# Altium PCB PCB1.PcbDoc
Units mm, origin at the board's own origin, x right, y up, seen from the top; angles counter-clockwise.
Board outline 100 x 60 mm, 2 copper layers (Top Layer, Bottom Layer); 35 components, 23 nets, 81 pads, 0 vias.
Unrouted connection lines stored in the file: 53.
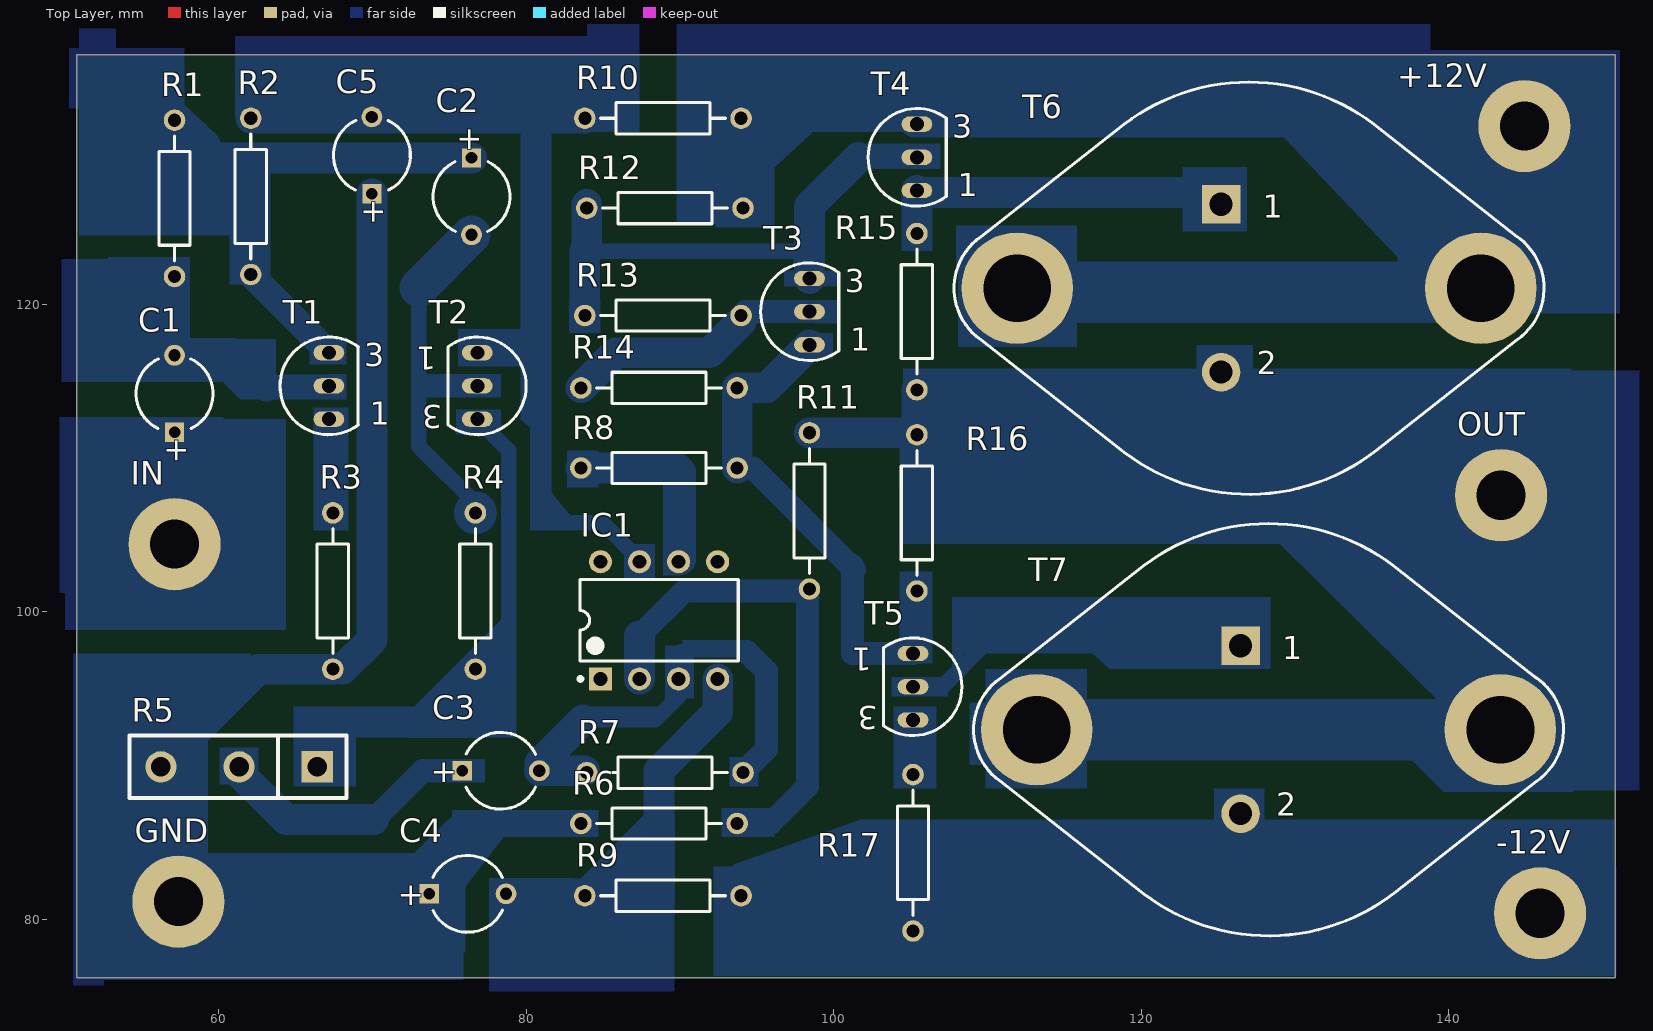
[diagram p0: Top Layer view]
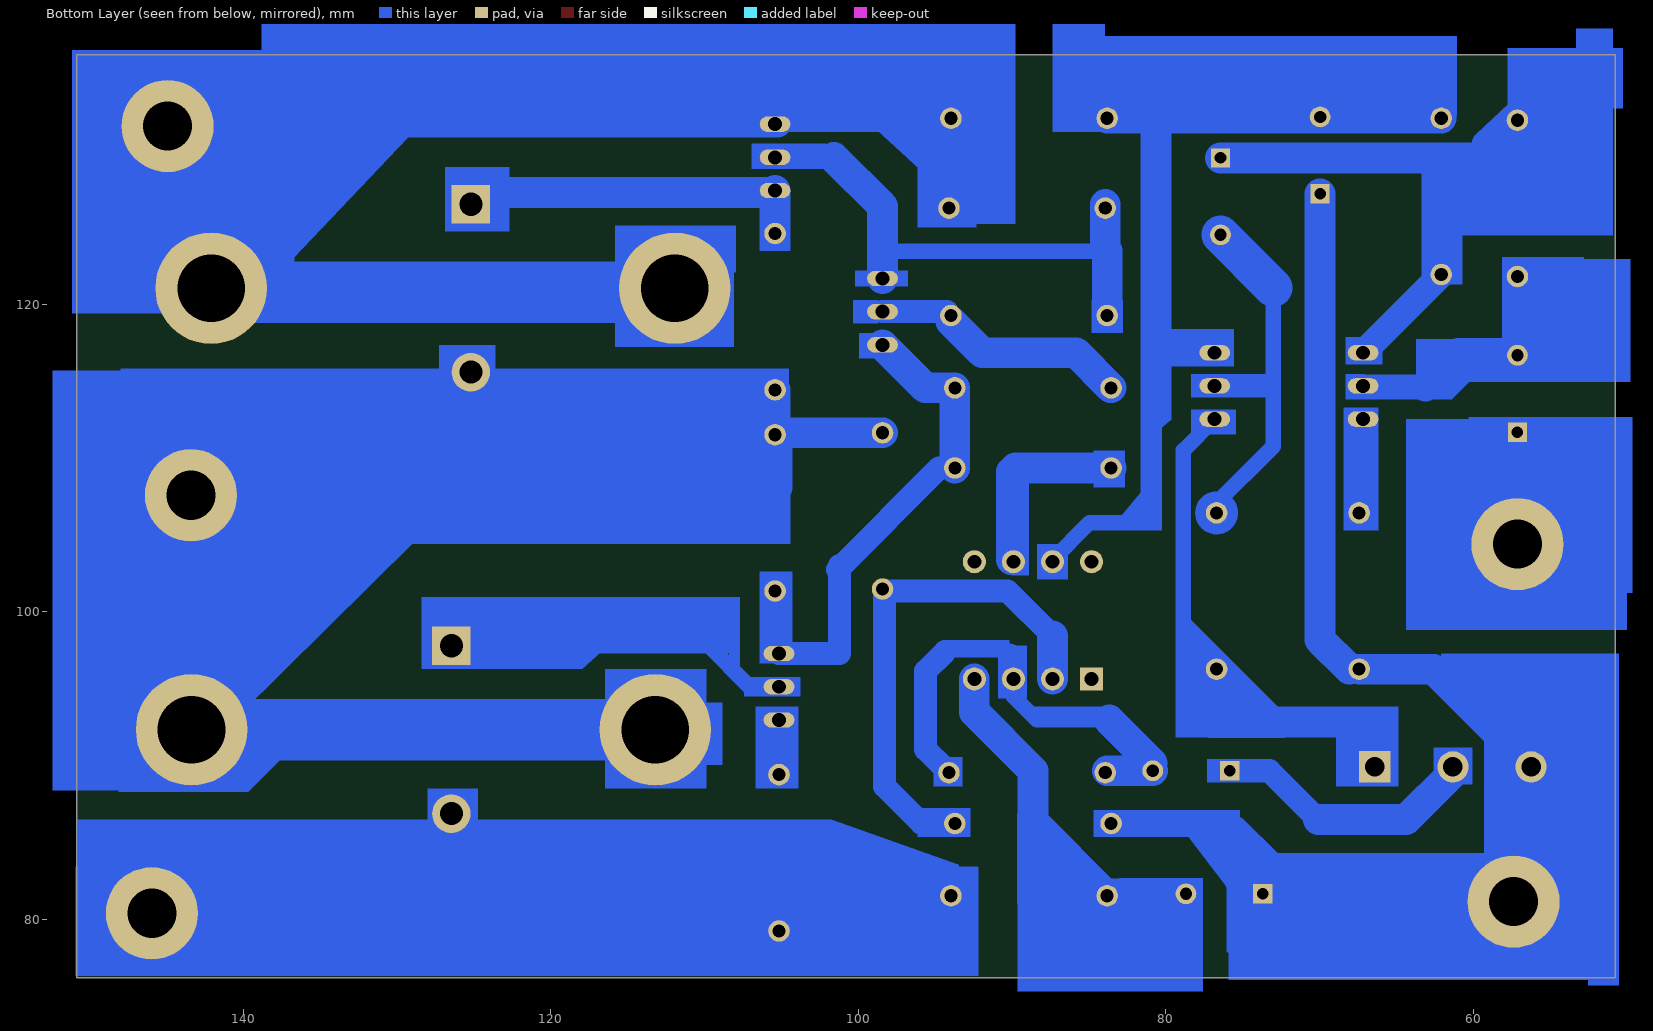
[diagram p1: Bottom Layer view, seen from below]

## Layer stack, top to bottom
Top Solder: solder mask 0.0102, Solder Resist, Dk 3.5
Top Layer: signal copper 0.0356
Dielectric 1: dielectric 0.32, FR-4, Dk 4.8
Bottom Layer: signal copper 0.0356
Bottom Solder: solder mask 0.0102, Solder Resist, Dk 3.5

## Board outline
50.8,76.2 150.8,76.2 150.8,136.2 50.8,136.2

## Design rules (kind name [scope] priority, off if disabled: settings)
Clearance [All] p1: gap=0.3
PolygonConnect [All] p1: connectstyle=Relief reliefconductorwidth=0.254 reliefentries=4 polygonreliefangle="90 Angle" airgapwidth=0.254
RoutingVias [All] p1: holewidth=0.8 width=1.6 viastyle="Through Hole" minholewidth=0.711 minwidth=1.27 maxholewidth=0.711 maxwidth=1.27
SolderMaskExpansion [All] p1: expansion=0.102
Width [All] p1: maxlimit=0.5 minlimit=0.254 preferedwidth=0.254
30 further rules are at their usual default settings.

## Components (designator, comment, footprint, x,y, rotation, side; value= is the part's Value field where it differs from the comment)
+12V "TP" TP2 144.907,131.572 r0 top
-12V "TP" TP2 145.923,80.391 r0 top
C1 "" CAPPR5-5x5 57.15,114.173 r90 top
C2 "" CAPPR5-5x5 76.454,127 r270 top
C3 "" CAPPR5-5x5 78.359,89.662 r0 top
C4 "" CAPPR5-5x5 76.2,81.661 r0 top
C5 "" CAPPR5-5x5 69.977,129.667 r90 top
GND "TP" TP2 57.404,81.153 r0 top
IC1 "uA741" DIP-8 88.646,99.441 r90 top
IN "TP" TP2 57.15,104.394 r0 top
OUT "TP" TP2 143.383,107.569 r0 top
R1 "" AXIAL-0.4 57.15,126.873 r90 top
R2 "" AXIAL-0.4 62.103,127 r90 top
R3 "" AXIAL-0.4 67.437,101.346 r90 top
R4 "" AXIAL-0.4 76.708,101.346 r90 top
R5 "RPOT" RPOT 66.421,89.916 r180 top
R6 "" AXIAL-0.4 88.646,86.233 r180 top
R7 "" AXIAL-0.4 89.027,89.535 r180 top
R8 "" AXIAL-0.4 88.646,109.347 r180 top
R9 "" AXIAL-0.4 88.9,81.534 r180 top
R10 "" AXIAL-0.4 88.9,132.08 r180 top
R11 "" AXIAL-0.4 98.425,106.553 r90 top
R12 "" AXIAL-0.4 89.027,126.238 r180 top
R13 "" AXIAL-0.4 88.9,119.253 r180 top
R14 "" AXIAL-0.4 88.646,114.554 r180 top
R15 "" AXIAL-0.4 105.41,119.507 r90 top
R16 "" AXIAL-0.4 105.41,106.426 r90 top
R17 "" AXIAL-0.4 105.156,84.328 r90 top
T1 "9014" TANS 67.183,114.681 r0 top
T2 "9012" TANS 76.835,114.681 r180 top
T3 "9014" TANS 98.425,119.507 r0 top
T4 "8050" TANS 105.41,129.54 r0 top
T5 "8550" TANS 105.156,95.123 r180 top
T6 "2N3055" TO-3 127,121.031 r0 top
T7 "2N3055" TO-3 128.27,92.329 r0 top

## Footprints (in the part's own frame and the unit in brackets; to place one, negate y for a bottom-side part, rotate by r counter-clockwise, add the part's x,y. Pads: shape width x height; smd on the part's side, far side on the other; paste and mask are expansions set on the pad)
AXIAL-0.4 [mm] "Axial Device, Thru-Hole; 2 Leads; 0.4 in Pin Spacing"
  round 1.4 hole 0.85: 1(-5.08,0) 2(5.08,0)
  silkscreen extent -4.06,-1.02 4.06,1.02
CAPPR5-5x5 [mm] "Capacitor, Electrolytic, Radial; Body 5 x 5 mm (Dia.xH typ); Pin Spacing 5 mm (typ)"
  rect 1.25x1.25 hole 0.75: 1(-2.5,0)
  round 1.35 hole 0.8: 2(2.5,0)
  silkscreen extent -2.26,-2.5 2.27,2.5
DIP-8 [mm] "DIP; 8 Leads; Row Spacing 7.62 mm; Pitch 2.54 mm"
  rect 1.5x1.5 hole 0.9: 1(-3.81,3.81)
  round 1.5 hole 0.9: 2(-3.81,1.27) 3(-3.81,-1.27) 4(-3.81,-3.81) 5(3.81,-3.81) 6(3.81,-1.27) 7(3.81,1.27) 8(3.81,3.81)
  silkscreen extent -3.93,-5.15 2.65,5.23, body extent -3.6,-5.15 3.6,5.15, height 5.08
RPOT [mil]
  rect 80x80 hole 50: 1(0,0)
  round 80 hole 50: 2(200,0) 3(400,0)
  silkscreen extent -75,-80 480,80
TANS [mm] "TO, Flat Index; 3 In-Line, Axial Leads; Body Dia. 4.5mm; Leads 0.51 x 0.48 mm (max)"
  oval 2x1 hole 0.9: 1(0,-2.159) 2(0,0) 3(0,2.159)
  silkscreen extent -3.17,-3.17 1.92,3.17
TO-3 [mm]
  rect 2.5x2.5 hole 1.5: 1(-1.815,5.46)
  round 2.5 hole 1.5: 2(-1.815,-5.46)
  round 7.25 hole 4.4: 3(-15.075,0) 3(15.075,0)
  silkscreen extent -19.17,-13.4 19.17,13.4
TP2 [mm]
  round 6 hole 3.2: 1(0,0)

## Part data
C1 C2 C3 C4 C5: library part Cap, "Capacitor"
IC1: "OAP"
R1 R2 R3 R4 R6 R7 R8 R9 R10 R11 R12 R13 R14 R15 R16 R17: library part Res2, "Resistor"
R5: "Potentiometer"
T1 T3 T4 T6 T7: library part 2N3904, "NPN General Purpose Amplifier"
T2 T5: library part 2N3906, "PNP General Purpose Amplifier"

## Nets (pads, with @x,y where several pads share a name; then routed paths per layer and width w, separated by ;. In a path a pad name is that pad's centre, name@x,y a point inside that pad or via, vN(x,y) a via of type N, cw(c..) or ccw(c..) an arc to the next point about the centre after c; other vN are vias at no path point)
1: IC1.1
8: IC1.8
+12: +12V.1 R10.2 R12.2 T4.3 T6.3 | length 28.2
  Bottom Layer w1: 83.82,123.444 98.425,123.444
  Bottom Layer w2: 61,116.8 63.119,114.681 ; 85.852,116.84 91.948,116.84 ; 98.425,126.365 101.6,129.54
-12: -12V.1 R9.2 R17.1 T7.1
GND: C4.2 C5.1 GND.1 R3.1 R5.3 R6.1 R7.1
NetC1_1: C1.1 IN.1 | length 3.6
  Bottom Layer w2: 57.404,116.8 61,116.8
NetC1_2: C1.2 R1.1 T1.2 | length 6.9
  Bottom Layer w0.254: 59.15,130.334 59.69,129.794
  Bottom Layer w2: 57.15,115.951 R1.1@57.15,122.047
NetC2_1: C2.1 R1.2 R2.1 T1.3
NetC2_2: C2.2 R4.1 T2.2
NetC3_1: C3.1 R5.2
NetC3_2: C3.2 IC1.3 R7.2
NetC4_1: C4.1 IC1.4 R9.1
NetC5_2: C5.2 IC1.7 R2.2 R10.1 T2.1
NetIC1_2: IC1.2 R6.2 R11.1
NetIC1_6: IC1.6 R8.1
NetOUT_1: OUT.1 R11.2 R15.1 R16.2 T6.1 T7.3
NetR3_2: R3.2 T1.1
NetR5_1: R5.1 T2.3
NetR8_2: R8.2 R14.1 T3.1 T5.2
NetR12_1: R12.1 R13.2 T3.3 T4.2
NetR13_1: R13.1 R14.2 T3.2
NetR15_2: R15.2 T4.1 T6.2 | length 28.8
  Bottom Layer w4: 114.046,92.329 142.875,92.329
NetR17_2: R17.2 T5.3 T7.2
pads on no net: IC1.5 R4.2 R16.1 T5.1
copper on no net: | length 599.5
  Bottom Layer w0.254: 56.515,80.899 57.277,81.661 ; 57.023,132.334 57.531,131.953 57.404,131.953 ; 57.15,104.394 57.404,104.648 ; 57.404,121.793 57.658,121.793 ; 61.341,89.535 61.341,89.916 ; 66.929,117.094 67.056,117.094 ; 67.183,106.68 67.437,106.426 ; 67.437,96.266 68.072,96.266 ; 73.025,114.808 73.152,114.681 ; 73.152,92.837 73.025,92.964 73.279,92.964 ; 73.533,83.693 73.533,81.828 73.7,81.661 ; 75.311,85.471 76.073,86.233 ; 76.073,95.758 76.2,95.758 ; 76.835,95.758 76.835,96.012 ; 76.835,112.522 77.597,112.522 ; 78.74,96.266 78.867,96.393 ; 80.732,89.789 81.367,90.424 ; 83.566,109.347 83.82,109.347 ; 83.566,119.253 83.82,119.507 ; 83.693,81.661 83.82,81.534 ; 83.693,109.093 84.074,109.093 ; 83.82,89.662 83.947,89.789 ; 83.82,123.444 83.947,123.571 ; 87.376,95.631 87.376,96.012 ; 87.376,103.251 87.376,103.378 ; 89.281,97.028 cw(c90.233,96.837) 90.424,97.79 ; 89.789,109.347 90.043,109.093 ; 93.98,118.872 93.98,119.253 94.234,119.507 ; 93.98,132.08 94.361,131.699 ; 104.775,111.633 104.902,111.76 ; 104.902,124.587 105.41,125.095 ; 105.156,97.282 105.41,97.536 ; 105.283,108.077 105.41,108.204 ; 105.283,111.633 105.41,111.76 ; 112.903,121.158 113.284,120.777 ; 124.422,127.254 125.185,126.491 ; 125.095,108.458 125.095,115.316 ; 126.455,81.878 126.656,81.878 ; 143.345,105.245 145.415,107.315 ; 145.923,131.826 146.05,131.953 ; 146.939,81.407 147.574,81.407 147.955,81.026
  Bottom Layer w0.5: 77.858,106.426 ccw(c76.708,106.426) 77.858,106.426
  Bottom Layer w0.8: 90.551,97.409 94.361,97.409
  Bottom Layer w1: 73.025,121.071 73.025,110.744 76.835,106.934 ; 73.152,114.681 76.835,114.681 ; 76.708,96.266 78.74,96.266 ; 76.835,112.522 78.867,110.49 78.867,98.044 78.867,96.393 ; 76.835,116.84 76.835,117.602 ; 83.693,92.964 88.392,92.964 89.916,94.488 89.916,95.631 ; 83.693,105.791 84.963,105.791 87.376,103.378 ; 89.916,96.774 90.551,97.409 ; 93.726,109.347 94.742,109.347 ; 94.361,131.699 105.41,131.699 ; 101.6,129.54 105.41,129.54 ; 105.156,95.123 107.061,95.123 109.728,97.79 111.76,97.79 ; 111.632,97.789 126.455,97.789
  Bottom Layer w1.5: 63.119,114.681 67.183,114.681 ; 70.104,86.487 73.279,89.662 75.732,89.662 ; 76.073,86.233 83.566,86.233 ; 76.835,105.918 76.835,106.934 ; 87.376,98.425 90.297,101.346 98.298,101.346 98.298,88.646 95.885,86.233 93.726,86.233 ; 89.916,95.631 89.916,96.774 ; 94.234,119.507 98.425,119.507 ; 94.361,89.789 95.631,91.059 95.631,92.964 95.631,96.139 94.361,97.409 ; 94.742,109.347 101.346,102.743 ; 101.219,97.282 105.156,97.282 ; 101.219,102.997 101.219,97.536 101.346,97.409 ; 105.156,89.408 105.156,92.964 ; 105.41,97.536 105.41,101.346
  Bottom Layer w1.7: 62.103,121.92 66.929,117.094
  Bottom Layer w2: 56.515,90.17 62.611,96.266 67.437,96.266 ; 57.023,132.334 59.15,130.334 ; 59.777,129.5 76.454,129.5 ; 61.341,89.535 64.389,86.487 70.104,86.487 ; 62.103,132.08 68.62,132.08 83.82,132.08 ; 66.421,89.916 66.421,92.837 73.152,92.837 ; 67.183,106.68 67.183,112.141 ; 68.072,96.266 69.977,98.171 69.977,127.167 ; 73.279,92.964 76.073,95.758 ; 73.533,83.693 75.565,85.725 ; 78.7,81.661 83.693,81.661 ; 80.645,121.412 80.645,132.08 ; 80.859,89.662 83.82,89.662 ; 80.899,90.17 83.693,92.964 ; 83.566,109.347 89.789,109.347 ; 83.566,114.554 85.852,116.84 ; 83.82,81.534 88.646,86.36 88.646,89.662 92.456,93.472 92.456,95.631 ; 83.82,119.507 83.82,123.444 ; 83.947,123.571 83.947,126.492 ; 87.376,95.631 87.376,98.425 ; 90.043,103.378 90.043,109.093 ; 91.948,116.84 93.98,118.872 ; 93.726,109.347 93.726,114.554 95.631,114.554 98.425,117.348 ; 98.425,111.633 105.283,111.633 105.283,108.077 ; 98.425,121.666 98.425,126.365 ; 105.283,131.826 145.923,131.826 ; 105.41,108.204 131.191,108.204 ; 105.41,111.76 105.41,114.427 ; 105.41,125.095 105.41,127.381 ; 105.41,127.254 124.422,127.254
  Bottom Layer w2.5: 73.025,121.071 76.454,124.5
  Bottom Layer w3: 130.937,108.331 143.637,108.331 ; 142.075,121.031 146.05,125.006 146.05,131.318
  Bottom Layer w4: 113.284,120.777 142.113,120.777
  Bottom Layer w5: 56.515,80.899 56.515,90.17

## Other copper
Bottom Layer:
  rectangle net NetIC1_6: 88.9,102.362 90.043,108.839
  rectangle net NetR8_2: 98.933,116.459 99.949,118.11
  rectangle net NetR13_1: 98.679,118.745 100.33,120.269
  rectangle net NetR12_1: 96.774,121.158 100.203,122.174
  rectangle net NetR12_1: 102.108,128.778 106.934,130.429
  rectangle net NetR15_2: 104.394,123.444 106.426,125.73
  rectangle net +12: 107.95,122.047 115.824,125.095
  rectangle net +12: 108.077,117.221 115.824,124.714
  rectangle net NetR15_2: 123.571,114.427 127.254,117.348
  rectangle net NetOUT_1: 108.839,90.043 111.379,94.107
  rectangle: 109.855,88.519 116.459,96.266
  rectangle net NetR17_2: 124.714,84.963 128.016,88.519
  rectangle: 104.267,97.536 105.156,102.616
  rectangle: 104.775,96.647 106.426,102.616
  rectangle net NetR8_2: 103.759,94.488 107.442,95.758
  rectangle net NetR17_2: 103.886,88.519 106.68,93.853
  rectangle net NetC4_1: 92.202,76.327 95.885,83.439
  rectangle net GND: 92.71,86.741 96.012,87.249
  rectangle net GND: 92.71,85.344 96.139,86.995
  rectangle net GND: 93.218,88.646 95.123,90.551
  rectangle net NetC3_2: 89.027,94.361 90.932,97.79
  rectangle net NetC5_2: 86.36,102.108 88.392,104.394
  rectangle net NetR8_2: 82.677,108.077 84.709,110.49
  rectangle net NetR8_2: 82.804,108.331 84.709,110.236
  rectangle net NetR12_1: 82.804,118.11 84.836,120.269
  rectangle net NetC2_2: 73.406,113.919 78.359,115.443
  rectangle net NetR5_1: 75.438,111.506 78.359,113.157
  rectangle: 77.216,85.344 79.883,85.725
  rectangle net NetIC1_2: 75.184,86.487 79.883,87.122
  rectangle net NetIC1_2: 79.883,85.344 84.709,87.122
  rectangle net NetIC1_2: 80.264,86.36 84.201,87.122
  rectangle net NetC3_1: 75.184,88.9 77.343,90.424
  rectangle net NetR5_1: 64.897,88.646 68.961,93.853
  rectangle net NetC3_1: 60.071,88.773 61.214,91.186
  rectangle net NetC3_1: 60.325,88.773 62.611,91.186
  rectangle net NetC2_1: 65.913,116.078 68.326,117.856
  rectangle net NetC1_2: 67.056,114.554 68.326,115.443
  rectangle net NetR3_2: 66.167,107.569 68.453,113.284
  rectangle net NetR3_2: 66.167,105.283 68.453,107.569
  rectangle: 77.47,106.172 77.724,106.68
  rectangle: 75.692,106.299 76.073,106.807
  rectangle: 77.089,105.918 77.597,107.061
  rectangle: 75.819,105.664 77.47,107.315
  rectangle: 90.17,97.409 94.488,98.171
  rectangle: 89.662,97.536 90.17,97.79
  rectangle: 89.662,97.282 90.297,97.536
  rectangle: 89.789,125.222 94.107,138.43
  rectangle net +12: 83.947,131.191 87.376,139.192
  rectangle: 83.439,93.218 88.773,93.853
  rectangle net NetC1_1: 50.038,98.806 64.389,102.108
  rectangle net NetC1_1: 60.071,101.092 64.389,112.522
  rectangle net -12: 77.597,75.311 89.662,81.026
  rectangle net GND: 52.324,76.073 75.946,78.486
  rectangle net GND: 50.546,75.692 52.578,97.282
  rectangle net NetC1_1: 49.657,101.219 53.594,112.649
  rectangle net NetC1_1: 49.784,114.935 53.213,122.936
  rectangle net NetC2_1: 50.927,124.46 53.34,137.922
  rectangle net NetC2_1: 50.292,132.715 57.785,136.652
  rectangle: 61.087,132.207 84.709,137.414
  rectangle net NetOUT_1: 122.682,126.111 126.873,128.905
  rectangle net NetOUT_1: 122.682,124.714 126.873,126.111
  rectangle net NetOUT_1: 126.492,126.111 126.873,126.746
  rectangle: 126.492,128.016 126.619,128.143
  rectangle: 92.329,132.842 138.811,138.557
  rectangle net +12: 138.176,119.38 151.13,136.525
  rectangle: 101.727,82.931 150.749,86.487
  rectangle net NetOUT_1: 142.875,88.392 152.4,115.697
  rectangle: 93.472,76.327 150.876,83.439
  rectangle: 56.515,129.032 59.055,131.064
  rectangle net NetC2_1: 52.705,124.46 61.595,129.413
  rectangle net NetC2_1: 52.832,124.714 57.404,133.223
  rectangle net NetC2_1: 60.706,121.285 63.373,130.429
  rectangle: 104.521,110.363 147.955,115.824
  rectangle net +12: 136.652,119.38 148.082,134.874
  rectangle net NetOUT_1: 104.394,104.394 146.558,110.617
  rectangle net NetOUT_1: 139.7,88.773 146.431,110.617
  rectangle net NetOUT_1: 145.415,88.9 148.082,110.617
  rectangle: 93.472,77.597 148.082,83.439
  rectangle net -12: 109.474,97.79 127.508,100.965
  rectangle net -12: 117.983,96.266 128.397,100.965
  rectangle net -12: 107.696,97.282 109.474,100.965
  rectangle net -12: 107.696,96.456 108.394,97.282
  rectangle net NetC1_1: 52.832,114.935 58.166,123.063
  rectangle net NetC1_1: 52.832,101.092 60.325,112.649
  rectangle net NetC1_1: 57.658,114.935 61.468,116.078
  rectangle: 61.468,113.792 68.326,115.189
  rectangle net NetC1_1: 61.214,115.316 63.754,117.729
  rectangle net NetOUT_1: 139.7,88.265 148.082,89.154
  rectangle: 77.089,91.821 79.375,96.901
  rectangle: 79.629,112.522 81.661,123.19
  rectangle: 75.565,115.951 81.026,118.364
  rectangle: 75.819,116.078 80.264,117.983
  rectangle: 80.264,105.283 81.661,112.903
  rectangle: 80.264,105.283 85.09,106.299
  rectangle net NetC5_2: 93.345,131.826 136.652,134.62
  rectangle net NetR12_1: 93.472,124.968 96.139,134.366
  rectangle net NetR12_1: 92.329,125.095 94.488,134.62
  rectangle net NetR12_1: 92.329,124.968 94.107,127.889
  rectangle: 77.597,80.391 83.058,82.677
  rectangle: 56.769,77.851 76.073,84.328
  rectangle: 52.578,94.869 62.103,97.282
  rectangle net GND: 52.578,77.851 59.309,97.282
  rectangle net GND: 58.293,93.853 60.198,96.52
  region: 93.472,83.566 93.472,82.995 98.234,82.995 102.489,83.566 102.489,85.725 101.727,86.487
  region: 61.468,113.792 61.468,115.062 60.198,115.062
  region net NetOUT_1: 139.7,88.265 139.7,91.186 139.573,91.059 136.906,91.059
  region: 77.343,96.266 77.343,91.948 77.216,91.821 72.263,91.821 72.263,92.075 72.39,92.202
  region: 75.184,96.266 78.74,99.822 78.74,96.266
  region: 79.629,112.522 80.518,112.522 80.518,111.76
  region: 81.661,107.696 81.661,106.172 82.931,106.172
  region: 117.983,96.266 117.983,97.409 116.713,97.409
  region net +12: 129.286,130.81 131.064,131.191 132.969,130.937 137.16,131.318 136.779,122.936
  region net NetR12_1: 96.012,128.778 96.012,131.445 96.139,131.318 98.806,131.318
  region net NetOUT_1: 128.905,104.521 139.319,104.521 139.7,104.902 140.208,104.394 140.208,93.345
  region net -12: 89.662,86.868 89.662,81.026 89.027,80.391 82.042,80.391
  region net NetC4_1: 78.994,85.979 76.073,82.169 75.692,80.518 73.152,83.058 76.073,85.979 76.073,86.233

## Silkscreen, mask and mechanical layers (free items; w line width, h text height)
Mechanical 11:
  lines w0: 77.216,117.094 80.772,117.094

## Text inside footprints (layer, text, board x,y; h text height)
C1: Top Overlay "+" at 57.9,109.623 h1.5 r90
C2: Top Overlay "+" at 75.704,131.55 h1.5 r270
C3: Top Overlay "+" at 73.809,88.912 h1.5
C4: Top Overlay "+" at 71.65,80.911 h1.5
C5: Top Overlay "+" at 70.727,125.117 h1.5 r90
T1: Top Overlay "1" at 69.85,112.141 h1.5; Top Overlay "3" at 69.469,115.951 h1.5
T2: Top Overlay "1" at 74.168,117.221 h1.5 r180; Top Overlay "3" at 74.549,113.411 h1.5 r180
T3: Top Overlay "1" at 101.092,116.967 h1.5; Top Overlay "3" at 100.711,120.777 h1.5
T4: Top Overlay "1" at 108.077,127 h1.5; Top Overlay "3" at 107.696,130.81 h1.5
T5: Top Overlay "1" at 102.489,97.663 h1.5 r180; Top Overlay "3" at 102.87,93.853 h1.5 r180
T6: Top Overlay "2" at 127.508,115.443 h1.5; Top Overlay "1" at 127.889,125.603 h1.5
T7: Top Overlay "2" at 128.778,86.741 h1.5; Top Overlay "1" at 129.159,96.901 h1.5